# EAGLE board MiniPS-1b (EAGLE 5.06)
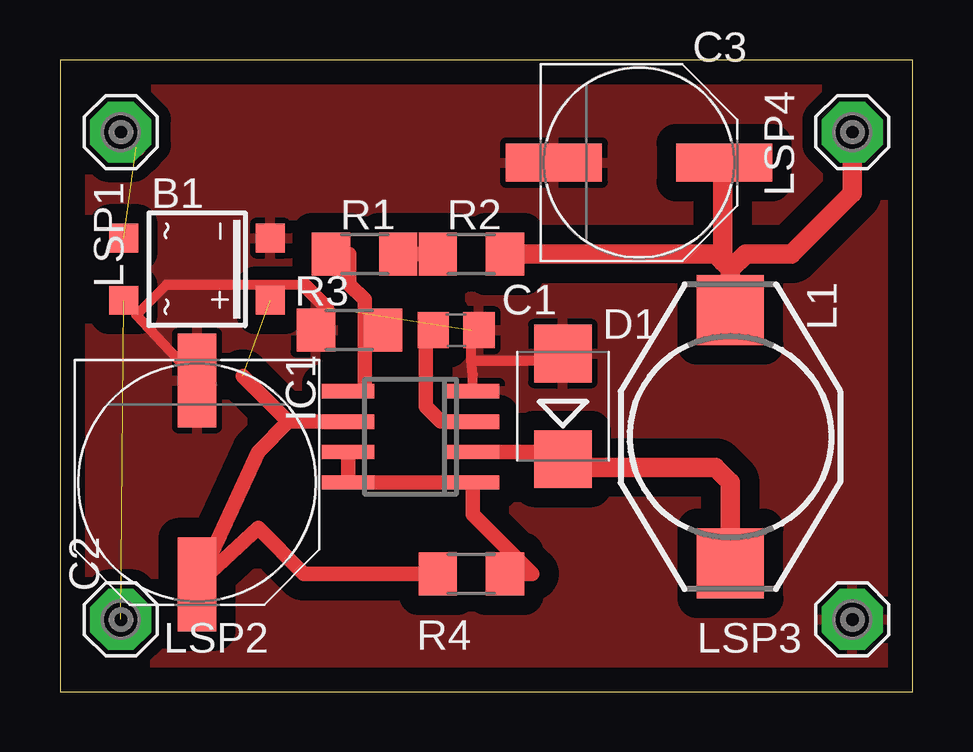
[diagram p0: board, top side]
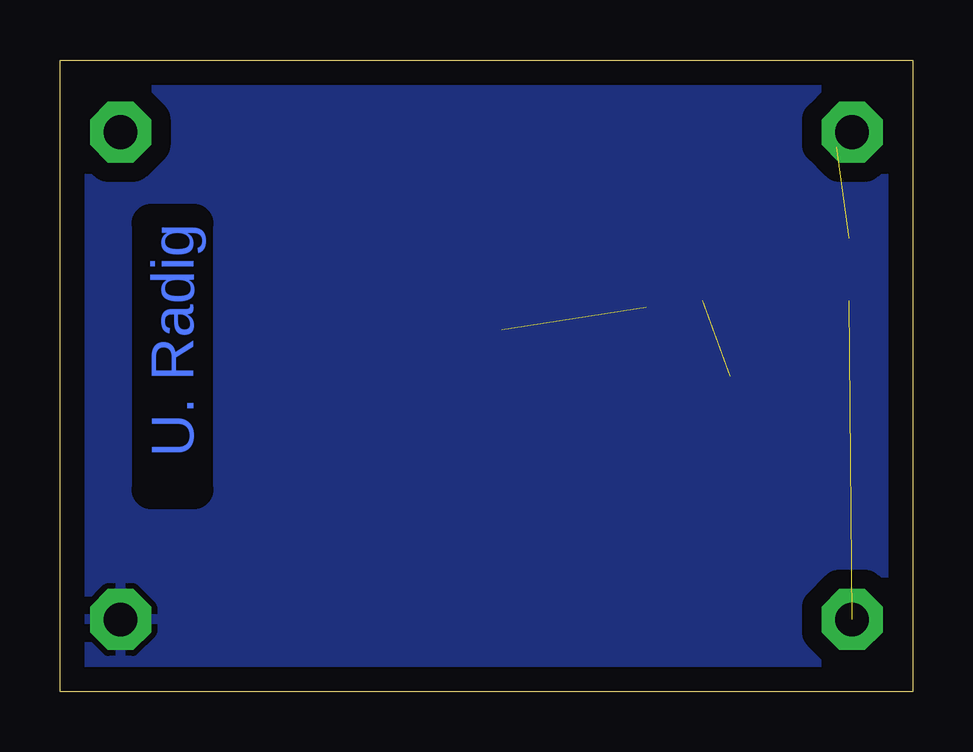
[diagram p1: board, bottom side, seen from below]

Size 35.54 x 26.34 mm. Coordinates in mm from the lower left corner, seen from the top.
Outline: 0,0 35.54,0 35.54,26.34 0,26.34 0,0
Copper layers (1*16): Top 0.035mm / dielectric 1.5mm / Bottom 0.035mm
Design rules "default": minimum track width 10mil, minimum drill 24mil, track to track 8mil, track to pad 8mil, pad to pad 8mil, via to via 8mil, smd to smd 8mil, copper to edge 40mil, drill to drill 8mil, minimum pad ring 10mil, minimum via ring 8mil, stop-mask expansion 4mil, vias tented up to drill 0mil, thermal gap 10mil

## Footprints (pad centres in the part's own frame; a part is rotated, then mirrored left to right if it is on the bottom)
SOIC-4 = smd 1.2 x 1.2: + 1.3,3.05; - -1.3,3.05; ~1 -1.3,-3.05; ~2 1.3,-3.05
C0805 = smd 1.3 x 1.5: 1 -0.95,0; 2 0.95,0
PANASONIC_G = smd 3.9 x 1.6: + 4.25,0; - -4.25,0
PANASONIC_F = smd 4 x 1.6: + 3.55,0; - -3.55,0
SMB = smd 2.4 x 2.4: A 2.2,0; C -2.2,0
SOIC8 = smd 0.6 x 2.2: 1 -1.905,-2.6; 2 -0.635,-2.6; 3 0.635,-2.6; 4 1.905,-2.6; 5 1.905,2.6; 6 0.635,2.6; 7 -0.635,2.6; 8 -1.905,2.6
DO3316P = smd 2.92 x 2.79: 1 -5.28,0; 2 5.28,0
SE14 = drill 1.397 pad 2.54 octagon: MP 0,0
R1206 = smd 1.6 x 1.8: 1 -1.4,0; 2 1.4,0

## Placement (x,y rotation side)
B1  MB2S  [SOIC-4]  5.71,17.62 270 top
C1  [C0805]  16.51,15.08 0 top
C2  [PANASONIC_G]  5.71,8.73 270 top
C3  [PANASONIC_F]  24.12,22.06 0 top
D1  [SMB]  20.95,11.9 90 top
IC1  MC34063AD  [SOIC8]  14.6,10.63 90 top
L1  [DO3316P]  27.94,10.63 270 top
LSP1  SE14  [SE14]  2.54,23.33 0 top
LSP2  SE14  [SE14]  2.54,3.01 0 top
LSP3  SE14  [SE14]  33.02,3.01 0 top
LSP4  SE14  [SE14]  33.02,23.33 0 top
R1  [R1206]  12.69,18.25 0 top
R2  [R1206]  17.14,18.25 0 top
R3  [R1206]  12.06,15.08 0 top
R4  [R1206]  17.14,4.92 0 top

## Library data of the parts
B1 = rectifier
C1-C3 R1-R4 = rcl
D1 = diode
IC1 = mc34063
L1 = inductor-coilcraft
LSP1-LSP4 = solpad

## Nets
GND: B1.- C1.2 C2.- C3.- D1.A IC1.4 LSP3.MP R3.1
N$1: R1.2 R2.1
N$2: B1.+ C2.+ IC1.6 R4.1
N$3: B1.~2 LSP2.MP
N$4: B1.~1 LSP1.MP
N$5: C3.+ L1.1 LSP4.MP R2.2
N$7: IC1.5 R1.1 R3.2
N$8: C1.1 IC1.3
N$9: D1.C IC1.2 L1.2
N$10: IC1.1 IC1.7 IC1.8 R4.2

## Tracks (layer width: path | path; a pad name or v marks a point on that pad's centre or on a via)
GND  (1 unrouted)
  Top 0.406: 17.14,15.08 17.2,15.02 | D1.A 20.95,13.81 17.14,13.81 | IC1.4 17.2,13.23 17.14,13.81 | 17.14,15.08 C1.2 | 17.14,13.81 17.14,15.08 | 10.15,16.98 4.44,16.98 3.17,15.71 C2.-
  Top 0.61: R3.1 11.11,16.03 10.15,16.98
  pour Top (isolate 0.813): 0.63,25.87 34.92,25.87 34.92,0.47 0.63,0.47
  pour Bottom (isolate 0.813): 0.63,25.87 0.63,0.47 34.92,0.47 34.92,25.87
N$1
  Top 0.61: R1.2 R2.1
N$2  (1 unrouted)
  Top 0.61: 9.52,11.27 7.62,13.17 | 9.52,11.27 8.25,10 C2.+ 8.25,6.82 10.15,4.92 R4.1 | 9.52,11.27 IC1.6
N$3  (1 unrouted)
N$4  (1 unrouted)
  Top 0.813: LSP1.MP 3.17,22.7
N$5
  Top 0.61: L1.1 27.94,15.71
  Top 0.813: 27.62,17.93 27.3,18.25 R2.2 | 27.62,17.93 27.94,17.62 | 27.94,17.62 L1.1 | 27.94,17.62 28.57,18.25 30.48,18.25 33.02,20.79 LSP4.MP | C3.+ 27.62,22.06 27.62,17.93
N$7
  Top 0.61: IC1.5 12.69,12.54 12.69,15.08 | R1.1 12.06,18.25 12.06,16.98 12.69,16.35 12.69,15.08 | 12.69,15.08 R3.2
N$8
  Top 0.406: 15.23,15.08 C1.1
  Top 0.61: IC1.3 15.87,11.27 15.23,11.9 15.23,15.08
N$9
  Top 0.406: D1.C 20.95,9.36 20.32,10
  Top 0.61: IC1.2 20.32,10
  Top 0.813: L1.2 27.94,8.73 27.3,9.36 20.95,9.36
N$10
  Top 0.406: IC1.7 12.06,10 12,9.94
  Top 0.61: 12,9.94 IC1.8 IC1.1 17.2,7.39 19.68,4.92 R4.2

## Text on the board
Bottom: U. Radig